# Altium PCB PCB.PcbDoc
Units mm, origin at the board's own origin, x right, y up, seen from the top; angles counter-clockwise.
Board outline 90.17 x 79.38 mm, 2 copper layers (Top Layer, Bottom Layer); 28 components, 54 nets, 224 pads, 76 vias.
Unrouted connection lines stored in the file: 67.
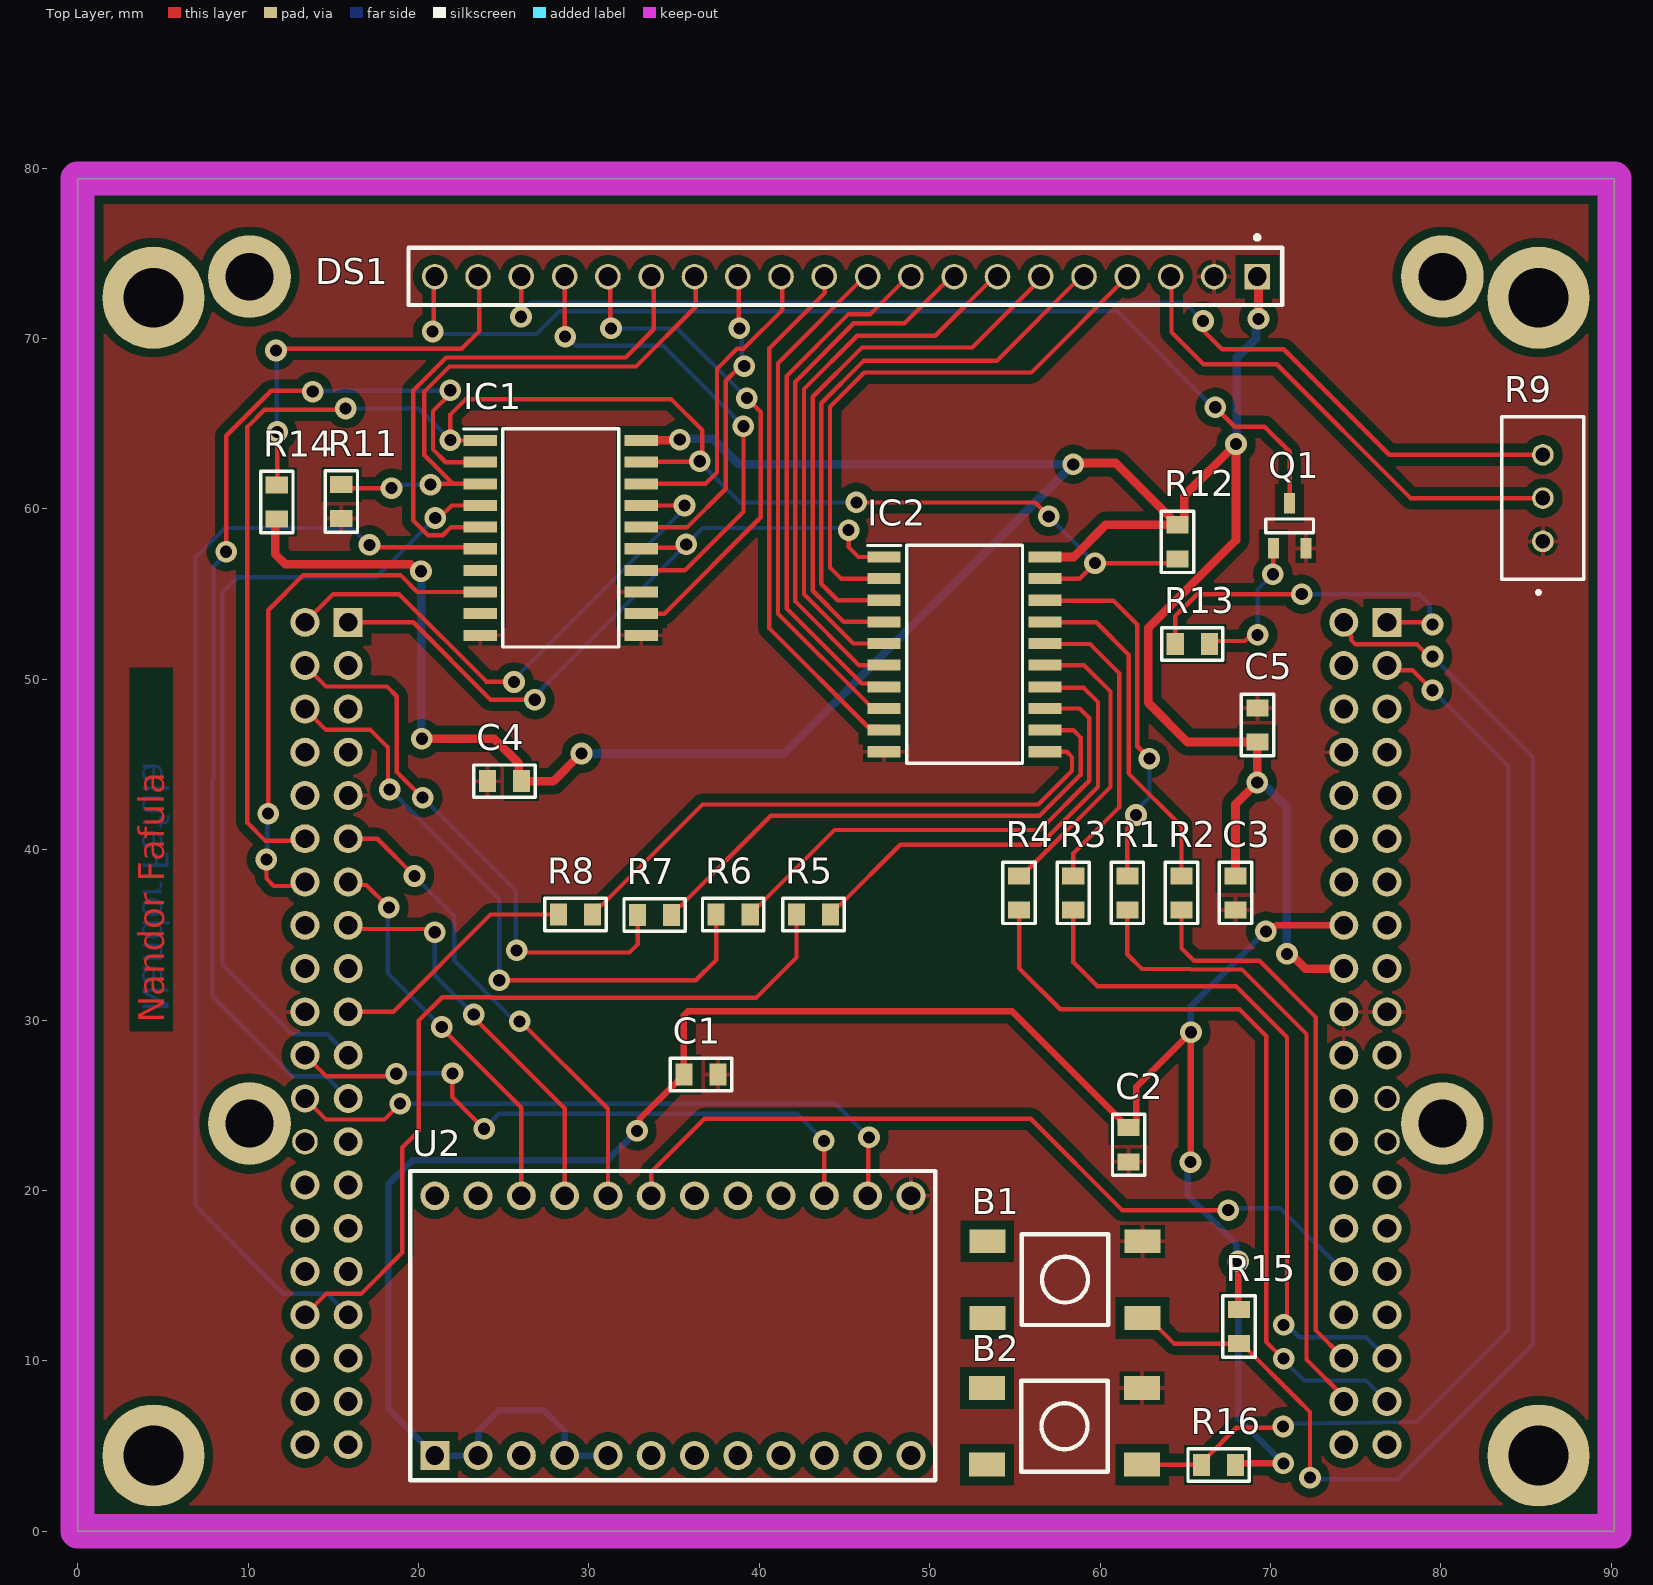
[diagram p0: Top Layer view]
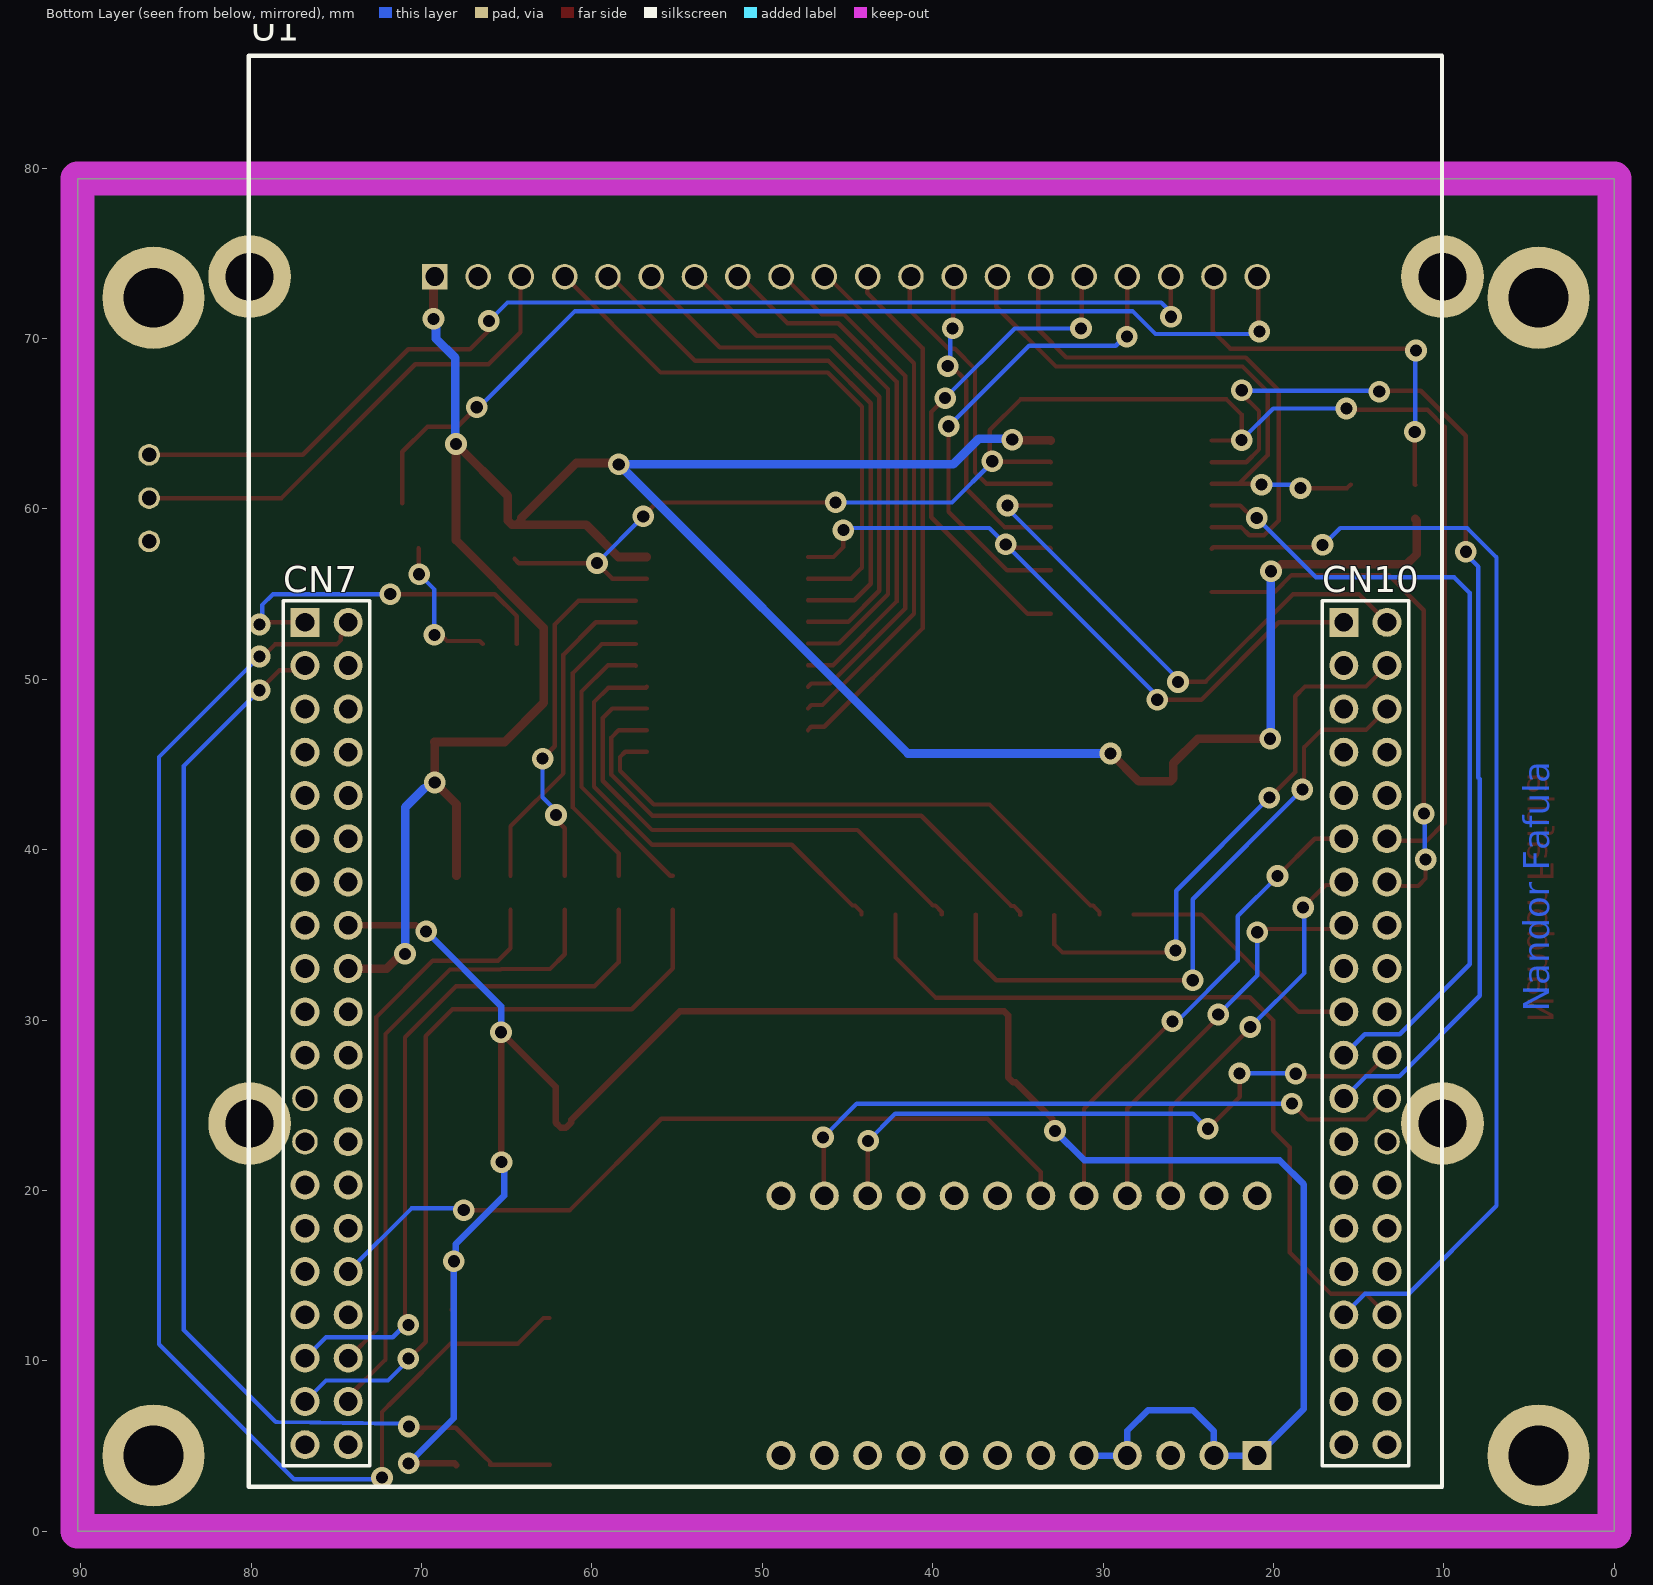
[diagram p1: Bottom Layer view, seen from below]
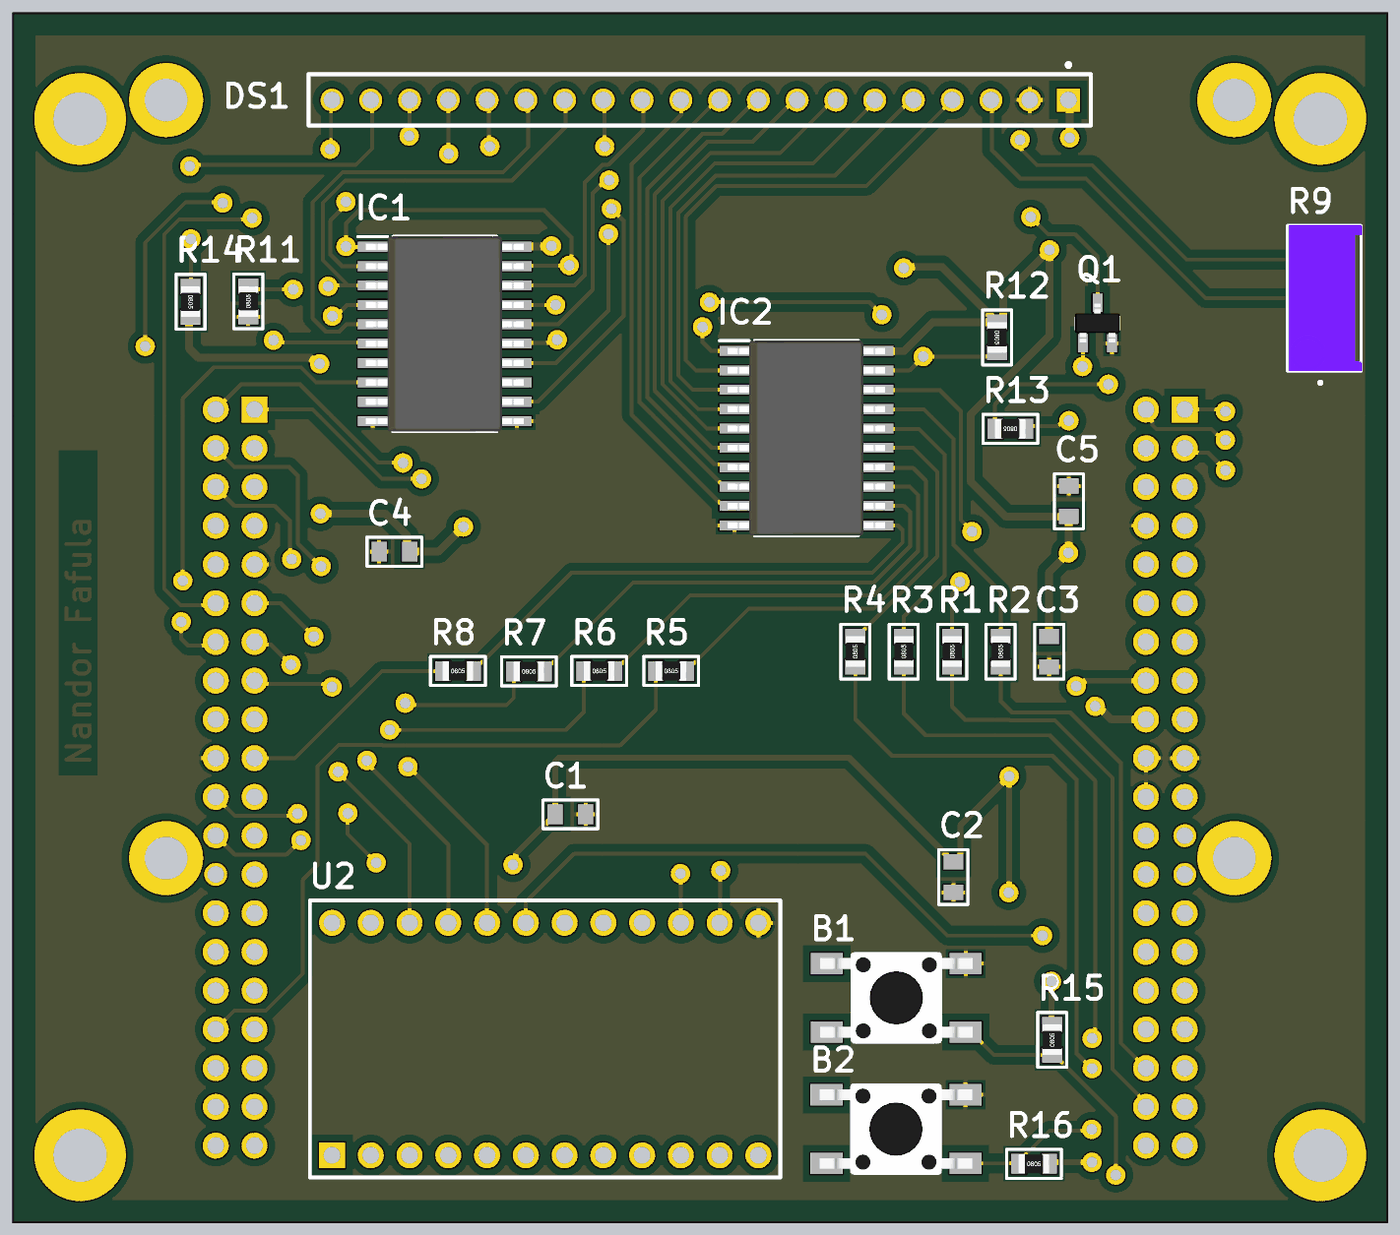
[diagram p2: 3D render of the assembled board from above, using the file's embedded part models]

## Layer stack, top to bottom
Top Solder: solder mask 0.0102, Solder Resist, Dk 3.5
Top Layer: signal copper 0.0356
Dielectric 1: dielectric 0.32, FR-4, Dk 4.8
Bottom Layer: signal copper 0.0356
Bottom Solder: solder mask 0.0102, Solder Resist, Dk 3.5

## Board outline
0,0 90.17,0 90.17,79.375 0,79.375

## Design rules (kind name [scope] priority, off if disabled: settings)
Clearance [All] p1: gap=0.254 ignorepadtopadclearanceinfootprint=FALSE except(0.508: Arc-Fill Arc-Poly Arc-Region Track-Fill Track-Poly Track-Region SMDPad-Fill SMDPad-Poly SMDPad-Region THPad-Fill THPad-Poly THPad-Region Via-Fill Via-Poly Via-Region Fill-Fill Fill-Poly Fill-Region Poly-Poly Poly-Region Region-Region)
HoleSize [All] p1: absolutevalues=TRUE maxlimit=3.5 minlimit=0.711 maxpercent=80.000 minpercent=20.000
PolygonConnect [All] p1: connectstyle=Relief reliefconductorwidth=0.254 reliefentries=4 polygonreliefangle="90 Angle" airgapwidth=0.254
RoutingVias [All] p1: holewidth=0.711 width=1.27 viastyle="Through Hole" minholewidth=0.711 minwidth=1.143 maxholewidth=0.711 maxwidth=1.27
SolderMaskExpansion [All] p1: expansion=0.102 istentingtop=FALSE
Width [InNet('GND')] p1: maxlimit=0.508 minlimit=0.254 preferedwidth=0.254 minimp=50.000000 maximp=50.000000 favimp=50.000000
29 further rules are at their usual default settings.

## Components (designator, comment, footprint, x,y, rotation, side; value= is the part's Value field where it differs from the comment)
B1 "Button" FSM4JSMA_AUT 57.934,14.768 r270 top
B2 "Button" FSM4JSMA_AUT 57.909,6.162 r270 top
C1 "100nF" FP_0805_CAP_085 36.576,26.797 r180 top
C2 "100nF" FP_0805_CAP_085 61.671,22.682 r90 top
C3 "100nF" FP_0805_CAP_085 67.945,37.465 r90 top
C4 "100nF" FP_0805_CAP_085 25.044,44.018 r0 top
C5 "100nF" FP_0805_CAP_085 69.24,47.32 r270 top
DS1 "RG12864B-BIW-V" RG12864B-BIW-V_AUT 69.214,73.627 r180 top
IC1 "SN74HCT244DW" SN74HCT244DW 28.346,58.293 r0 top
IC2 "SN74HCT245DW" SN74HCT245DW 52.044,51.46 r0 top
Q1 "NMOS" FP_SOT23-3 71.12,59.004 r270 top
R1 "1K" FP_0805_RES 61.595,37.465 r90 top
R2 "1K" FP_0805_RES 64.77,37.465 r90 top
R3 "1K" FP_0805_RES 58.42,37.465 r90 top
R4 "1K" FP_0805_RES 55.245,37.465 r90 top
R5 "1K" FP_0805_RES 43.18,36.195 r0 top
R6 "1K" FP_0805_RES 38.465,36.195 r0 top
R7 "1K" FP_0805_RES 33.858,36.17 r0 top
R8 "1K" FP_0805_RES 29.21,36.195 r0 top
R9 "3296W-1-103RLF" 3296W-1-103R 85.979,60.63 r90 top
R11 "100K" FP_0805_RES 15.469,60.427 r90 top
R12 "100K" FP_0805_RES 64.541,58.064 r270 top
R13 "4.7K" FP_0805_RES 65.405,52.07 r180 top
R14 "30R" FP_0805_RES 11.684,60.401 r270 top
R15 "100K" FP_0805_RES 68.148,12.014 r90 top
R16 "100K" FP_0805_RES 66.954,3.886 r0 top
U1 "NUCLEO-F446RE" FP_NUCLEO-64 76.835,53.34 r180 bottom locked
U2 "MKI178V1" MKI178V1 20.955,4.445 r270 top

## Footprints (in the part's own frame and the unit in brackets; to place one, negate y for a bottom-side part, rotate by r counter-clockwise, add the part's x,y. Pads: shape width x height; smd on the part's side, far side on the other; paste and mask are expansions set on the pad)
3296W-1-103R [mil]
  round 50 hole 34: 1(-100,0) 2(0,0) 3(100,0)
  silkscreen extent -222,-95 188,95, body extent -188,-97 188,93, height 455
FP_0805_CAP_085 [mm] "0805 kapacitás YAGEO 0.85mm magas"
  rect 1x1.3 smd: 1(-1,0) 2(1,0)
  silkscreen extent -1.8,-0.95 1.8,0.95, body extent -1,-0.64 1.03,0.64, height 0.85
FP_0805_RES [mm] "0805 ellenállás"
  rect 1x1.3 smd: 1(-1,0) 2(1,0)
  silkscreen extent -1.8,-0.95 1.8,0.95, body extent -1,-0.62 1,0.63, height 0.62
FP_NUCLEO-64 [mm]
  round 1.7 hole 1.1: 0(0,-48.26) 0(2.54,-48.26) 0(60.96,-48.26) 0(63.5,-48.26) 2(2.54,0) 3(0,-2.54) 4(2.54,-2.54) 5(0,-5.08) 6(2.54,-5.08) 7(0,-7.62) 8(2.54,-7.62) 9(0,-10.16) 10(2.54,-10.16) 11(0,-12.7) 12(2.54,-12.7) 13(0,-15.24) 14(2.54,-15.24) 15(0,-17.78) 16(2.54,-17.78) 17(0,-20.32) 18(2.54,-20.32) 19(0,-22.86) 20(2.54,-22.86) 21(0,-25.4) 22(2.54,-25.4) 24(2.54,-27.94) 26(2.54,-30.48) 27(0,-33.02) 28(2.54,-33.02) 29(0,-35.56) 30(2.54,-35.56) 31(0,-38.1) 32(2.54,-38.1) 33(0,-40.64) 34(2.54,-40.64) 35(0,-43.18) 36(2.54,-43.18) 37(0,-45.72) 38(2.54,-45.72) 40(63.5,0) 41(60.96,-2.54) 42(63.5,-2.54) 43(60.96,-5.08) 44(63.5,-5.08) 45(60.96,-7.62) 46(63.5,-7.62) 47(60.96,-10.16) 48(63.5,-10.16) 49(60.96,-12.7) 50(63.5,-12.7) 51(60.96,-15.24) 52(63.5,-15.24) 53(60.96,-17.78) 54(63.5,-17.78) 55(60.96,-20.32) 56(63.5,-20.32) 57(60.96,-22.86) 58(63.5,-22.86) 59(60.96,-25.4) 60(63.5,-25.4) 61(60.96,-27.94) 63(60.96,-30.48) 65(60.96,-33.02) 66(63.5,-33.02) 67(60.96,-35.56) 68(63.5,-35.56) 69(60.96,-38.1) 70(63.5,-38.1) 71(60.96,-40.64) 72(63.5,-40.64) 73(60.96,-43.18) 74(63.5,-43.18) 75(60.96,-45.72) 76(63.5,-45.72)
  rect 1.7x1.7 hole 1.1: 1(0,0) 39(60.96,0)
  round 1.5 hole 1.1: 23(0,-27.94) 25(0,-30.48) 64(63.5,-30.48)
  round 1.65 hole 1.1: 62(63.5,-27.94)
  silkscreen extent -3.3,-50.73 66.72,33.25, body extent -3.3,-50.72 66.72,33.25, height 11
FP_SOT23-3 [mm] "SOT23-3 tok"
  rect 1.2x0.65 smd: 1(1.327,-0.95) 2(1.327,0.95) 3(-1.327,0)
  silkscreen extent -0.4,-1.4 0.4,1.4, body extent -1.27,-1.46 1.27,1.46, height 0.97
FSM4JSMA_AUT [mm] "SMD Push Button 6x6mm"
  rect 1.4x2.1 smd: 1(2.25,4.55) 2(2.25,-4.55) 3(-2.25,4.55) 4(-2.25,-4.55)
  silkscreen extent -2.67,-2.54 2.67,2.54, body extent -3,-5 3,5, height 5.1
MKI178V1 [mm] "MKI178V1"
  rect 1.7x1.7 hole 1.1: 1(0,0)
  round 1.7 hole 1.1: 2(0,2.54) 3(0,5.08) 4(0,7.62) 5(0,10.16) 6(0,12.7) 7(0,15.24) 8(0,17.78) 9(0,20.32) 10(0,22.86) 11(0,25.4) 12(0,27.94) 13(-15.24,27.94) 14(-15.24,25.4) 15(-15.24,22.86) 16(-15.24,20.32) 17(-15.24,17.78) 18(-15.24,15.24) 19(-15.24,12.7) 20(-15.24,10.16) 21(-15.24,7.62) 22(-15.24,5.08) 23(-15.24,2.54) 24(-15.24,0)
  silkscreen extent -16.7,-1.45 1.45,29.37, body extent -16.52,-1.28 1.28,29.21, height 4.86
RG12864B-BIW-V_AUT [mm]
  rect 1.5x1.5 hole 1.1: 1(0,0)
  round 1.5 hole 1.1: 2(2.54,0) 3(5.08,0) 4(7.62,0) 5(10.16,0) 6(12.7,0) 7(15.24,0) 8(17.78,0) 9(20.32,0) 10(22.86,0) 11(25.4,0) 12(27.94,0) 13(30.48,0) 14(33.02,0) 15(35.56,0) 16(38.1,0) 17(40.64,0) 18(43.18,0) 19(45.72,0) 20(48.26,0)
  round 4.85 hole 2.8: ""(-10.87,49.7) ""(-10.87,0) ""(59.13,49.7) ""(59.13,0)
  silkscreen extent -1.47,-2.4 49.8,1.67, body extent -13.37,-3 61.63,52.2, height 17.6
SN74HCT244DW [mm]
  rect 1.95x0.65 smd: 1(-4.725,5.715) 2(-4.725,4.445) 3(-4.725,3.175) 4(-4.725,1.905) 5(-4.725,0.635) 6(-4.725,-0.635) 7(-4.725,-1.905) 8(-4.725,-3.175) 9(-4.725,-4.445) 10(-4.725,-5.715) 11(4.725,-5.715) 12(4.725,-4.445) 13(4.725,-3.175) 14(4.725,-1.905) 15(4.725,-0.635) 16(4.725,0.635) 17(4.725,1.905) 18(4.725,3.175) 19(4.725,4.445) 20(4.725,5.715)
  silkscreen extent -5.7,-6.4 3.4,6.4, body extent -5.16,-6.4 5.16,6.4, height 1.75
SN74HCT245DW [mm]
  rect 1.95x0.65 smd: 1(-4.725,5.715) 2(-4.725,4.445) 3(-4.725,3.175) 4(-4.725,1.905) 5(-4.725,0.635) 6(-4.725,-0.635) 7(-4.725,-1.905) 8(-4.725,-3.175) 9(-4.725,-4.445) 10(-4.725,-5.715) 11(4.725,-5.715) 12(4.725,-4.445) 13(4.725,-3.175) 14(4.725,-1.905) 15(4.725,-0.635) 16(4.725,0.635) 17(4.725,1.905) 18(4.725,3.175) 19(4.725,4.445) 20(4.725,5.715)
  silkscreen extent -5.7,-6.4 3.4,6.4, body extent -5.16,-6.4 5.16,6.4, height 1.75

## Part data
B1 B2: library part FSM4JSMA_AUT, "Push button"
C1 C2 C3 C4 C5: library part 100nF_0805_CAP, "Capacitor"
DS1: "Display", Manufacturer_Name=RAYSTAR, Manufacturer_Part_Number=RG12864B-GHW-V, Datasheet Link=https://www.tme.eu/Document/ad0edd8197c217e1346010bf2253878c/RG12864B-GHW-V.pdf, Height=5.9mm
IC1: "Integrated Circuit", Manufacturer_Name="Texas Instruments", Mouser Part Number=595-SN74HCT244DW, Arrow Part Number=SN74HCT244DW, Arrow Price/Stock=https://www.arrow.com/en/products/sn74hct244dw/texas-instruments, Datasheet Link=http://www.ti.com/lit/ds/symlink/sn74hct244.pdf, Height=2.65mm, Manufacturer_Part_Number=SN74HCT244DW, Mouser Price/Stock=https://www.mouser.co.uk/ProductDetail/Texas-Instruments/SN74HCT244DW?qs=8yeEWhuAOtPaf02S2l6zdA%3D%3D
IC2: "Integrated Circuit", Manufacturer_Name="Texas Instruments", Mouser Part Number=595-SN74HCT245DW, Arrow Part Number=SN74HCT245DW, Arrow Price/Stock=https://www.arrow.com/en/products/sn74hct245dw/texas-instruments?region=nac, Datasheet Link=http://www.ti.com/lit/ds/symlink/sn74hct245.pdf, Height=2.65mm, Manufacturer_Part_Number=SN74HCT245DW, Mouser Price/Stock=https://www.mouser.co.uk/ProductDetail/Texas-Instruments/SN74HCT245DW?qs=5h8QSfodyRguwsnqzMvAgw%3D%3D
Q1: library part Si2308BDS, "Si2308BDS"
R1 R2 R3 R4 R5 R6 R7 R8: library part 1K_0805_RES, "Resistor"
R9: "Resistor", Manufacturer_Name=Bourns, Mouser Part Number=652-3296W-1-103RLF, Arrow Part Number=3296W-1-103RLF, Arrow Price/Stock=https://www.arrow.com/en/products/3296w-1-103rlf/bourns?region=nac, Datasheet Link=https://www.bourns.com/pdfs/3296.pdf, Manufacturer_Part_Number=3296W-1-103RLF, Mouser Price/Stock=https://www.mouser.co.uk/ProductDetail/Bourns/3296W-1-103RLF?qs=2bTIwLLrckTSiNyA4dRdUg%3D%3D
R11: library part 10K_0805_RES, "Resistor"
R12 R15 R16: library part 100K_0805_RES, "Resistor"
R13: library part 4_7K_0805_RES, "Resistor"
R14: library part 30R_0805_RES, "Resistor"
U2: "LSM6DS3 inertial module adapter", Name="MKI160V1 LSM6DS3 inertial module adapter", Reference=511-STEVAL-MKI160V1, Supplier=Mouser
U1: Name="Nucleo F446RE", Reference=NUCLEO, Supplier=Tanszék

## Free pads (board coordinates)
  round 6 hole 3.5: ""(4.445,4.445) ""(4.445,72.39) ""(85.725,4.445) ""(85.725,72.39)

## Via types
v1: diameter 1.27, hole 0.711, Top Layer to Bottom Layer, 76 vias

## Nets (pads, with @x,y where several pads share a name; then routed paths per layer and width w, separated by ;. In a path a pad name is that pad's centre, name@x,y a point inside that pad or via, vN(x,y) a via of type N, cw(c..) or ccw(c..) an arc to the next point about the centre after c; other vN are vias at no path point)
+3V3: C1.2 C2.2 R15.2 R16.2 U1.16 U2.1 U2.2 U2.4 U2.5 | length 137.2
  Top Layer w0.381: v1(32.817,23.495) 32.987,23.665 32.987,24.208 35.117,26.337 35.267,26.337 35.576,26.647 35.576,30.282 35.799,30.505 54.848,30.505 61.212,24.142 61.212,23.992 61.521,23.682 61.821,23.682 62.131,23.992 62.131,26.088 v1(65.329,29.286) v1@65.329,21.692 ; R16.2 68.056,3.988 v1(70.752,3.988) ; v1(68.097,15.85) 68.097,13.065 R15.2 ; v1(69.723,35.204) 69.964,35.204 70.319,35.56 U1.16
  Bottom Layer w0.381: U2.5 U2.4 28.575,5.893 27.356,7.112 24.74,7.112 23.495,5.867 U2.2 U2.1 18.212,7.188 18.212,20.345 19.639,21.773 31.095,21.773 v1(32.817,23.495) ; v1(65.303,21.666) 65.133,21.496 65.133,19.703 67.996,16.84 67.996,15.951 v1(68.097,15.85) 68.097,6.629 70.739,3.988 v1(70.752,3.988) ; v1(65.329,29.286) 65.329,30.81 v1(69.723,35.204)
+5V: C3.2 C4.2 C5.2 DS1.1 IC1.20 IC2.20 R12.1 R14.2 U1.18 | length 174.3
  Top Layer w0.508: R14.2 11.582,59.3 11.582,57.353 12.192,56.744 19.53,56.744 19.936,56.337 v1(20.142,56.337) ; v1(20.193,46.507) 24.435,46.507 25.878,45.064 25.878,44.184 C4.2 27.915,44.018 29.54,45.644 v1(29.566,45.644) ; IC1.20 33.097,64.033 35.306,64.033 v1(35.331,64.059) ; IC2.20 58.445,57.175 60.334,59.064 R12.1@64.391,59.064 ; v1(58.42,62.611) 58.496,62.687 60.919,62.687 64.145,59.46 64.145,59.31 R12.1@64.391,59.064 ; C3.2@67.941,38.469 67.941,42.668 69.228,43.955 69.228,46.308 C5.2 65.11,46.32 62.814,48.616 62.814,53.01 67.97,58.166 v1(67.97,63.805) 64.937,60.772 64.937,59.31 64.691,59.064 R12.1 R12.1@64.391,59.064 ; v1(69.291,71.145) DS1.1@69.292,73.83 ; v1(70.968,33.884) 71.174,33.884 72.037,33.02 U1.18
  Bottom Layer w0.508: v1(20.142,56.337) 20.168,56.312 20.168,46.533 v1(20.193,46.507) ; v1(29.566,45.644) 41.453,45.644 v1(58.42,62.611) 58.411,62.62 38.786,62.62 37.287,64.119 35.391,64.119 v1(35.331,64.059) ; v1(67.97,63.805) 68.021,63.856 68.021,68.859 69.145,69.984 69.145,71 v1(69.291,71.145) ; 69.835,43.602 70.942,42.494 70.942,33.909 v1(70.968,33.884)
  other v1: 69.215,43.942
CS: U1.32 U2.19 | length 47.1
  Top Layer w0.254: U2.19 33.655,21.082 36.779,24.206 55.931,24.206 61.289,18.848 v1(67.515,18.848)
  Bottom Layer w0.254: v1(67.515,18.848) 67.615,18.948 70.587,18.948 U1.32
DB0: R1.1 U1.38 | length 37.5
  Top Layer w0.254: R1.1 61.595,33.858 62.459,32.995 65.318,32.995 65.343,32.969 68.326,32.969 72.111,29.185 72.111,10.075 74.295,7.891 U1.38
DB1: R2.1 U1.36 | length 32.5
  Top Layer w0.254: R2.1 64.77,34.214 65.507,33.477 69.342,33.477 72.644,30.175 72.644,11.811 U1.36
DB2: R3.1 U1.35 | length 41.3
  Top Layer w0.254: R3.1 58.42,33.401 59.842,31.979 67.97,31.979 70.959,28.99 70.959,12.31 v1(70.764,12.116)
  Bottom Layer w0.254: v1(70.764,12.116) 70.963,12.116 71.688,11.391 75.604,11.391 U1.35
DB3: R4.1 U1.37 | length 46.1
  Top Layer w0.254: R4.1 55.245,33.045 57.658,30.632 68.174,30.632 69.748,29.058 69.748,11.116 70.73,10.135 v1(70.764,10.135)
  Bottom Layer w0.254: v1(70.764,10.135) 70.764,10.046 71.959,8.851 75.604,8.851 U1.37
DB4: R5.1 U1.72 | length 47.5
  Top Layer w0.254: U1.72 14.566,13.931 16.623,13.931 19.05,16.358 19.05,22.53 20.015,23.495 20.015,29.972 21.387,31.344 24.293,31.344 24.319,31.318 39.827,31.318 42.18,33.671 R5.1
DB5: R6.1 U1.44 | length 38.1
  Top Layer w0.254: U1.44 14.566,47.029 17.182,47.029 18.212,45.999 18.212,43.623 v1(18.306,43.528) ; v1(24.74,32.334) 36.271,32.334 37.465,33.528 R6.1
  Bottom Layer w0.254: v1(18.306,43.528) 24.74,37.095 v1(24.74,32.334)
DB6: R7.1 U1.42 | length 33.1
  Top Layer w0.254: U1.42 14.566,49.569 18.147,49.569 18.72,48.997 18.72,44.552 20.218,43.053 v1(20.244,43.053) ; v1(25.756,34.087) 25.883,33.96 32.385,33.96 32.858,34.433 R7.1
  Bottom Layer w0.254: v1(20.244,43.053) 25.705,37.592 25.705,34.138 v1(25.756,34.087)
DB7: R8.1 U1.57 | length 14.7
  Top Layer w0.254: U1.57 18.517,30.48 24.232,36.195 R8.1
GND: B1.3 B2.3 C1.1 C2.1 C3.1 C4.1 C5.1 DS1.2 IC1.10 IC1.11 IC1.13 IC2.10 Q1.2 R9.1 R11.1 U1.8 U1.19 U1.20 U1.22 U1.47 U1.58 U2.13
INT1: U1.62 U2.14 | length 38.3
  Top Layer w0.254: U1.62 14.566,24.169 17.997,24.169 v1(18.923,25.095) ; U2.14 46.393,19.723 46.393,23.076 v1(46.431,23.114)
  Bottom Layer w0.254: v1(18.923,25.095) 44.45,25.095 v1(46.431,23.114)
INT2: U1.60 U2.15 | length 37.5
  Top Layer w0.254: U1.60 14.566,26.709 18.556,26.709 v1(18.694,26.848) ; v1(21.996,26.873) 21.971,26.848 21.971,25.502 v1(23.851,23.622) ; v1(43.79,22.911) 43.802,22.898 43.802,19.698 U2.15
  Bottom Layer w0.254: v1(18.694,26.848) 18.72,26.873 v1(21.996,26.873) ; v1(23.851,23.622) 24.74,24.511 42.189,24.511 v1(43.79,22.911)
LCD_BL_PWM: R13.2 U1.1 | length 21.3
  Top Layer w0.254: R13.2 64.405,53.703 65.693,54.991 v1(71.831,54.991) ; U1.1 79.375,53.34 v1(79.502,53.213)
  Bottom Layer w0.254: v1(71.831,54.991) 78.715,54.991 79.35,54.356 79.35,53.365 v1(79.502,53.213)
LCD_CS1: IC1.2 U1.61 | length 64.9
  Top Layer w0.254: v1(8.712,57.48) 8.712,64.284 11.358,66.929 13.741,66.929 v1(13.792,66.878) ; v1(21.862,66.962) 21.862,66.744 20.853,65.735 20.853,63.487 21.603,62.738 IC1.2
  Bottom Layer w0.254: v1(8.712,57.48) 8.712,57.337 7.976,56.6 7.976,44.225 7.898,44.147 7.898,31.422 12.625,26.694 14.581,26.694 U1.61 ; v1(13.792,66.878) 13.834,66.92 21.82,66.92 v1(21.862,66.962)
LCD_CS2: IC1.4 U1.59 | length 48.7
  Top Layer w0.254: v1(20.98,59.461) 21.209,59.461 21.946,60.198 IC1.4
  Bottom Layer w0.254: U1.59 14.644,29.171 12.587,29.171 8.484,33.274 8.484,55.067 9.398,55.982 17.501,55.982 v1(20.98,59.461)
LCD_DI: IC1.8 U1.52 | length 32.7
  Top Layer w0.254: v1(11.176,42.113) 11.176,54.051 13.233,56.109 18.934,56.109 19.925,55.118 IC1.8 ; v1@11.349,39.421 v1(11.074,39.421) 11.074,38.303 11.506,37.871 13.106,37.871 U1.52 U1.52@12.95,38.1
  Bottom Layer w0.254: v1(11.074,39.421) 11.125,39.472 11.125,42.062 v1(11.176,42.113)
LCD_E: IC1.6 U1.71 | length 67.6
  Top Layer w0.254: v1(17.12,57.887) 17.259,57.747 23.532,57.747 IC1.6
  Bottom Layer w0.254: U1.71 14.63,13.945 12.065,13.945 6.909,19.101 6.909,57.15 8.636,58.877 16.078,58.877 17.069,57.887 v1(17.12,57.887)
LCD_OE: IC1.1 IC1.19 IC2.19 R12.2 U1.50 | length 98.7
  Top Layer w0.254: U1.50 13.208,40.513 11.024,40.513 9.957,41.58 9.957,64.81 10.958,65.811 15.646,65.811 v1(15.723,65.888) ; IC1.1 21.895,64.008 v1(21.869,64.033) 21.869,65.532 22.758,66.421 34.849,66.421 36.652,64.618 36.652,62.916 v1@36.5,62.763 ; IC1.19 33.097,62.763 36.474,62.763 v1(36.5,62.789) ; v1(45.695,60.376) 56.185,60.376 56.98,59.58 v1(56.98,59.555) ; IC2.19 58.801,55.905 59.698,56.803 v1(59.698,56.812) 64.289,56.812 R12.2
  Bottom Layer w0.254: v1(15.723,65.888) 20.015,65.888 v1(21.869,64.033) ; v1(36.5,62.789) 36.5,62.738 38.862,60.376 v1(45.695,60.376) ; v1(56.98,59.555) 56.98,59.542 59.698,56.824 v1(59.698,56.812)
LCD_R/W: IC1.15 IC2.1 U1.39 | length 41.7
  Top Layer w0.254: U1.39 19.685,53.34 24.232,48.793 v1(26.822,48.793) ; IC1.15 33.131,57.718 35.518,57.718 v1(35.712,57.912) ; v1(45.237,58.75) 45.237,57.76 45.822,57.175 IC2.1
  Bottom Layer w0.254: v1(26.822,48.793) 26.822,49.022 v1(35.712,57.912) 36.678,58.877 45.11,58.877 v1(45.237,58.75)
LCD_RST: IC1.17 U1.40 | length 32.1
  Top Layer w0.254: U1.40 14.986,54.991 18.85,54.991 23.981,49.86 25.578,49.86 v1(25.603,49.835) ; IC1.17 v1(35.611,60.198)
  Bottom Layer w0.254: v1(25.603,49.835) 25.603,50.013 35.611,60.02 v1(35.611,60.198)
MISO: U1.51 U2.22 | length 23.2
  Top Layer w0.254: U1.51 16.047,37.928 16.936,37.928 v1(18.263,36.601) ; v1(21.361,29.591) 21.361,29.531 26.035,24.857 U2.22
  Bottom Layer w0.254: v1(18.263,36.601) 18.186,36.525 18.186,32.766 v1(21.361,29.591)
MOSI: U1.53 U2.21 | length 23.8
  Top Layer w0.254: U1.53 16.087,35.348 20.761,35.348 v1(20.955,35.154) ; v1@23.241,30.15 28.575,24.816 U2.21 ; v1(23.241,30.328) v1@23.343,30.226
  Bottom Layer w0.254: v1(20.955,35.154) 20.955,32.614 v1(23.241,30.328)
NetB1_1: B1.1 R15.1 U1.2 | length 81.6
  Top Layer w0.254: B1.1 62.834,12.518 64.338,11.014 R15.1 68.298,11.014 71.591,7.722 72.314,6.999 v1(72.314,3.15) ; U1.2 74.295,52.949 74.727,52.517 74.727,52.299 74.981,52.045 78.597,52.045 79.308,51.333 v1(79.502,51.333)
  Bottom Layer w0.254: v1(72.314,3.15) 72.414,3.049 77.471,3.049 85.395,10.973 85.395,45.441 v1(79.502,51.333)
NetB2_1: B2.1 R16.1 U1.3 | length 67.5
  Top Layer w0.254: B2.1 65.929,3.912 R16.1 65.954,4.036 66.327,4.409 67.989,6.071 70.536,6.071 70.612,6.147 v1(70.739,6.147) ; U1.3 77.112,50.523 78.331,50.523 v1(79.502,49.352)
  Bottom Layer w0.254: v1(70.739,6.147) 70.83,6.238 70.903,6.311 78.444,6.41 78.547,6.411 78.62,6.484 83.947,11.811 83.947,44.907 v1(79.502,49.352)
NetDS1_3: DS1.3 R9.2 | length 29.3
  Top Layer w0.254: DS1.3@64.212,73.83 64.212,73.627 64.186,73.6 64.186,70.358 66.065,68.478 70.358,68.478 78.207,60.63 R9.2
NetDS1_4: DS1.4 IC2.2 | length 33.5
  Top Layer w0.254: IC2.2 44.791,55.905 44.145,56.551 44.145,65.989 46.152,67.996 55.963,67.996 DS1.4@61.622,73.655
NetDS1_5: DS1.5 IC2.3 | length 33.1
  Top Layer w0.254: IC2.3 44.602,54.635 43.637,55.601 43.637,66.2 46.119,68.682 53.933,68.682 DS1.5@58.966,73.715
NetDS1_6: DS1.6 IC2.4 | length 32.6
  Top Layer w0.254: IC2.4 44.958,53.365 43.129,55.194 43.129,66.573 46.025,69.469 52.49,69.469 56.452,73.431 DS1.6@56.566,73.431
NetDS1_7: DS1.7 IC2.5 | length 32
  Top Layer w0.254: IC2.5 45.51,52.095 42.621,54.984 42.621,67.031 45.745,70.155 50.326,70.155 DS1.7@53.886,73.715
NetDS1_8: DS1.8 IC2.6 | length 31.5
  Top Layer w0.254: IC2.6 45.847,50.825 42.113,54.559 42.113,67.462 45.542,70.891 48.523,70.891 DS1.8@51.346,73.715
NetDS1_9: DS1.9 IC2.7 | length 30.9
  Top Layer w0.254: IC2.7 47.121,49.753 46.005,49.753 41.605,54.153 41.605,67.793 45.237,71.425 46.516,71.425 DS1.9@48.806,73.715
NetDS1_10: DS1.10 IC2.8 | length 30.5
  Top Layer w0.254: DS1.10@46.266,73.715 41.097,68.546 41.097,53.848 46.462,48.483 47.121,48.483 IC2.8
NetDS1_11: DS1.11 IC2.9 | length 31.4
  Top Layer w0.254: DS1.11@43.841,73.83 43.841,72.67 40.589,69.418 40.589,52.984 46.36,47.213 47.121,47.213 IC2.9
NetDS1_12: DS1.12 IC1.18 | length 18.2
  Top Layer w0.254: IC1.18 36.844,61.468 37.516,62.139 37.516,68.213 38.695,69.393 39.072,69.393 41.352,71.673 DS1.12@41.352,73.83
NetDS1_13: DS1.13 IC1.16 | length 19.2
  Top Layer w0.254: IC1.16 35.778,58.928 38.024,61.174 38.024,67.513 38.887,68.377 v1(39.116,68.377) ; DS1.13@38.799,73.767 38.799,70.617 v1(38.829,70.587)
  Bottom Layer w0.254: v1(38.829,70.587) 38.973,70.443 38.973,68.52 v1(39.116,68.377)
NetDS1_14: DS1.14 IC1.3 R11.2 | length 34.5
  Top Layer w0.254: R11.2 15.681,61.214 v1(18.415,61.214) ; v1(20.701,61.417) 21.057,61.417 21.107,61.468 22.022,61.468 ; IC1.3 22.022,61.468 ; DS1.14@36.196,73.83 36.271,73.755 36.271,71.857 32.766,68.351 21.815,68.351 20.345,66.882 20.345,63.144 22.022,61.468
  Bottom Layer w0.254: v1@18.263,61.443 18.72,61.443 18.745,61.417 v1(20.701,61.417)
NetDS1_15: DS1.15 IC1.5 | length 31
  Top Layer w0.254: IC1.5 21.908,58.928 21.425,58.445 20.56,58.445 19.685,59.32 19.685,66.94 21.63,68.885 32.156,68.885 33.807,70.536 DS1.15@33.807,73.83
NetDS1_16: DS1.16 IC1.12 | length 29.6
  Top Layer w0.254: DS1.16@31.242,73.83 31.242,70.637 v1(31.293,70.587) ; IC1.12 34.427,53.848 40.081,59.502 40.081,65.684 v1(39.268,66.497)
  Bottom Layer w0.254: v1(31.293,70.587) 35.179,70.587 v1(39.268,66.497)
NetDS1_17: DS1.17 IC1.14 | length 28.8
  Top Layer w0.254: DS1.17@28.575,73.83 28.574,73.829 28.574,70.13 v1(28.6,70.104) ; IC1.14 35.625,56.388 39.065,59.828 v1(39.065,64.846)
  Bottom Layer w0.254: v1(28.6,70.104) 28.724,70.104 29.257,69.571 34.341,69.571 v1(39.065,64.846)
NetDS1_18: DS1.18 R9.3 | length 67
  Top Layer w0.254: DS1.18@25.997,73.804 26.023,73.779 26.023,71.286 v1(26.01,71.272) ; v1(66.04,71.018) 66.04,70.48 67.155,69.365 70.767,69.365 76.962,63.17 R9.3
  Bottom Layer w0.254: v1(26.01,71.272) 26.01,71.531 26.589,72.111 64.948,72.111 v1(66.04,71.018)
NetDS1_19: DS1.19 R14.1 | length 23.7
  Top Layer w0.254: v1(11.633,69.291) 11.735,69.393 22.53,69.393 23.572,70.435 DS1.19@23.572,73.83 ; R14.1 11.709,61.427 v1(11.709,64.516)
  Bottom Layer w0.254: v1(11.633,69.291) 11.671,69.253 11.671,64.554 v1(11.709,64.516)
NetDS1_20: DS1.20 Q1.3 | length 60.9
  Top Layer w0.254: v1(20.828,70.409) 20.892,70.473 20.892,73.69 DS1.20@21.032,73.83 ; v1(66.751,65.964) 67.894,64.821 69.647,64.821 71.12,63.348 Q1.3
  Bottom Layer w0.254: v1(20.828,70.409) 20.98,70.256 26.924,70.256 28.27,71.603 60.985,71.603 66.624,65.964 v1(66.751,65.964)
NetIC2_11: IC2.11 R8.2 | length 34.2
  Top Layer w0.254: R8.2 30.21,36.345 30.583,36.718 30.733,36.718 36.662,42.647 56.363,42.647 58.344,44.628 58.344,45.441 58.039,45.745 IC2.11
NetIC2_12: IC2.12 R7.2 | length 31.9
  Top Layer w0.254: R7.2 34.858,36.32 35.231,36.693 35.381,36.693 40.675,41.986 56.439,41.986 58.852,44.399 58.852,46.584 58.42,47.015 IC2.12
NetIC2_13: IC2.13 R6.2 | length 29.7
  Top Layer w0.254: R6.2 39.465,36.345 39.838,36.718 39.988,36.718 44.418,41.148 56.464,41.148 59.36,44.044 59.36,47.727 58.801,48.285 IC2.13
NetIC2_14: IC2.14 R5.2 | length 27.3
  Top Layer w0.254: R5.2 44.18,36.345 44.553,36.718 44.703,36.718 48.269,40.284 56.464,40.284 59.868,43.688 59.868,48.666 59.03,49.505 56.82,49.505 IC2.14
NetIC2_15: IC2.15 R4.2 | length 16.9
  Top Layer w0.254: R4.2 55.395,38.465 60.604,43.674 60.604,49.276 59.055,50.825 57.455,50.825 IC2.15@57.43,50.8
NetIC2_16: IC2.16 R3.2 | length 17.4
  Top Layer w0.254: IC2.16@57.43,52.07 59.411,52.07 61.112,50.368 61.112,42.469 58.42,39.776 R3.2
NetIC2_17: IC2.17 R2.2 | length 19.3
  Top Layer w0.254: IC2.17@57.43,53.34 59.766,53.34 61.671,51.435 61.671,44.475 64.77,41.377 R2.2
NetIC2_18: IC2.18 R1.2 | length 20.9
  Top Layer w0.254: IC2.18@57.43,54.61 60.782,54.61 62.179,53.213 62.179,46.065 62.89,45.353 v1(62.89,45.339) ; R1.2 61.595,41.254 62.103,41.762 v1(62.103,42.037)
  Bottom Layer w0.254: v1(62.103,42.037) 62.103,42.288 62.89,43.075 v1(62.89,45.339)
NetQ1_1: Q1.1 R13.1 | length 8.5
  Top Layer w0.254: R13.1 66.583,52.248 68.504,52.248 68.665,52.409 69.046,52.409 v1(69.24,52.603) ; v1(70.137,56.159) 70.153,56.176 70.153,57.661 Q1.1
  Bottom Layer w0.254: v1(69.24,52.603) 69.24,55.263 v1(70.137,56.159)
SCK: U1.49 U2.20 | length 28.5
  Top Layer w0.254: U1.49 17.577,40.64 v1(19.761,38.456) ; v1(25.933,29.921) 25.984,29.921 31.115,24.79 U2.20
  Bottom Layer w0.254: v1(19.761,38.456) 19.761,38.43 22.103,36.088 22.103,33.483 25.665,29.921 v1(25.933,29.921)
pads on no net: B1.2 B1.4 B2.2 B2.4 DS1. IC1.7 IC1.9 U1.0 U1.4 U1.5 U1.6 U1.7 U1.9 U1.10 U1.11 U1.12 U1.13 U1.14 U1.15 U1.17 U1.21 U1.23 U1.24 U1.25 U1.26 U1.27 U1.28 U1.29 U1.30 U1.31 U1.33 U1.34 U1.41 U1.43 U1.45 U1.46 U1.48 U1.54 U1.55 U1.56 U1.63 U1.64 U1.65 U1.66 U1.67 U1.68 U1.69 U1.70 U1.73 U1.74 U1.75 U1.76 U2.3 U2.6 U2.7 U2.8 U2.9 U2.10 U2.11 U2.12 U2.16 U2.17 U2.18 U2.23 U2.24

## Polygon pours and split planes (outlines as drawn)
GND on Top Layer "GND_L01_P002" (solid, remove dead copper, pour order 2): 1.016,78.359 89.154,78.359 89.154,1.016 89.153,1.017 1.016,1.017

## Keep-outs
Keep-Out Layer:
  lines w2: 0,0 90.17,0 90.17,79.375 67.627,79.375 22.543,79.375 0,79.375 0,0

## Other copper
Top Layer:
  pour cut-out: 0,0 0.025,0.025
  pour cut-out: 0,0
  pour cut-out: 0,0
  pour cut-out: 0.051,0.051
  text "Nandor Fafula" at 5.08,29.845 h1.52 r90
Bottom Layer:
  text "Nandor Fafula" at 3.81,30.48 h1.52 r270

## Silkscreen, mask and mechanical layers (free items; w line width, h text height)
Top Solder:
  the board outline again, w0.254
Mechanical 1:
  the board outline again, w0.254

## Text inside footprints (layer, text, board x,y; h text height)
U1: Bottom Overlay "CN7" at 78.105,55.118 h1.52; Bottom Overlay "CN10" at 17.145,55.118 h1.52